# Altium PCB DecentralizeLV_LPDRV.PcbDoc
Units mil, origin at the board's own origin, x right, y up, seen from the top; angles counter-clockwise.
Board outline 5000 x 3675 mil, 2 copper layers (Top Layer, Bottom Layer); 63 components, 52 nets, 211 pads, 100 vias.
Unrouted connection lines stored in the file: 8.
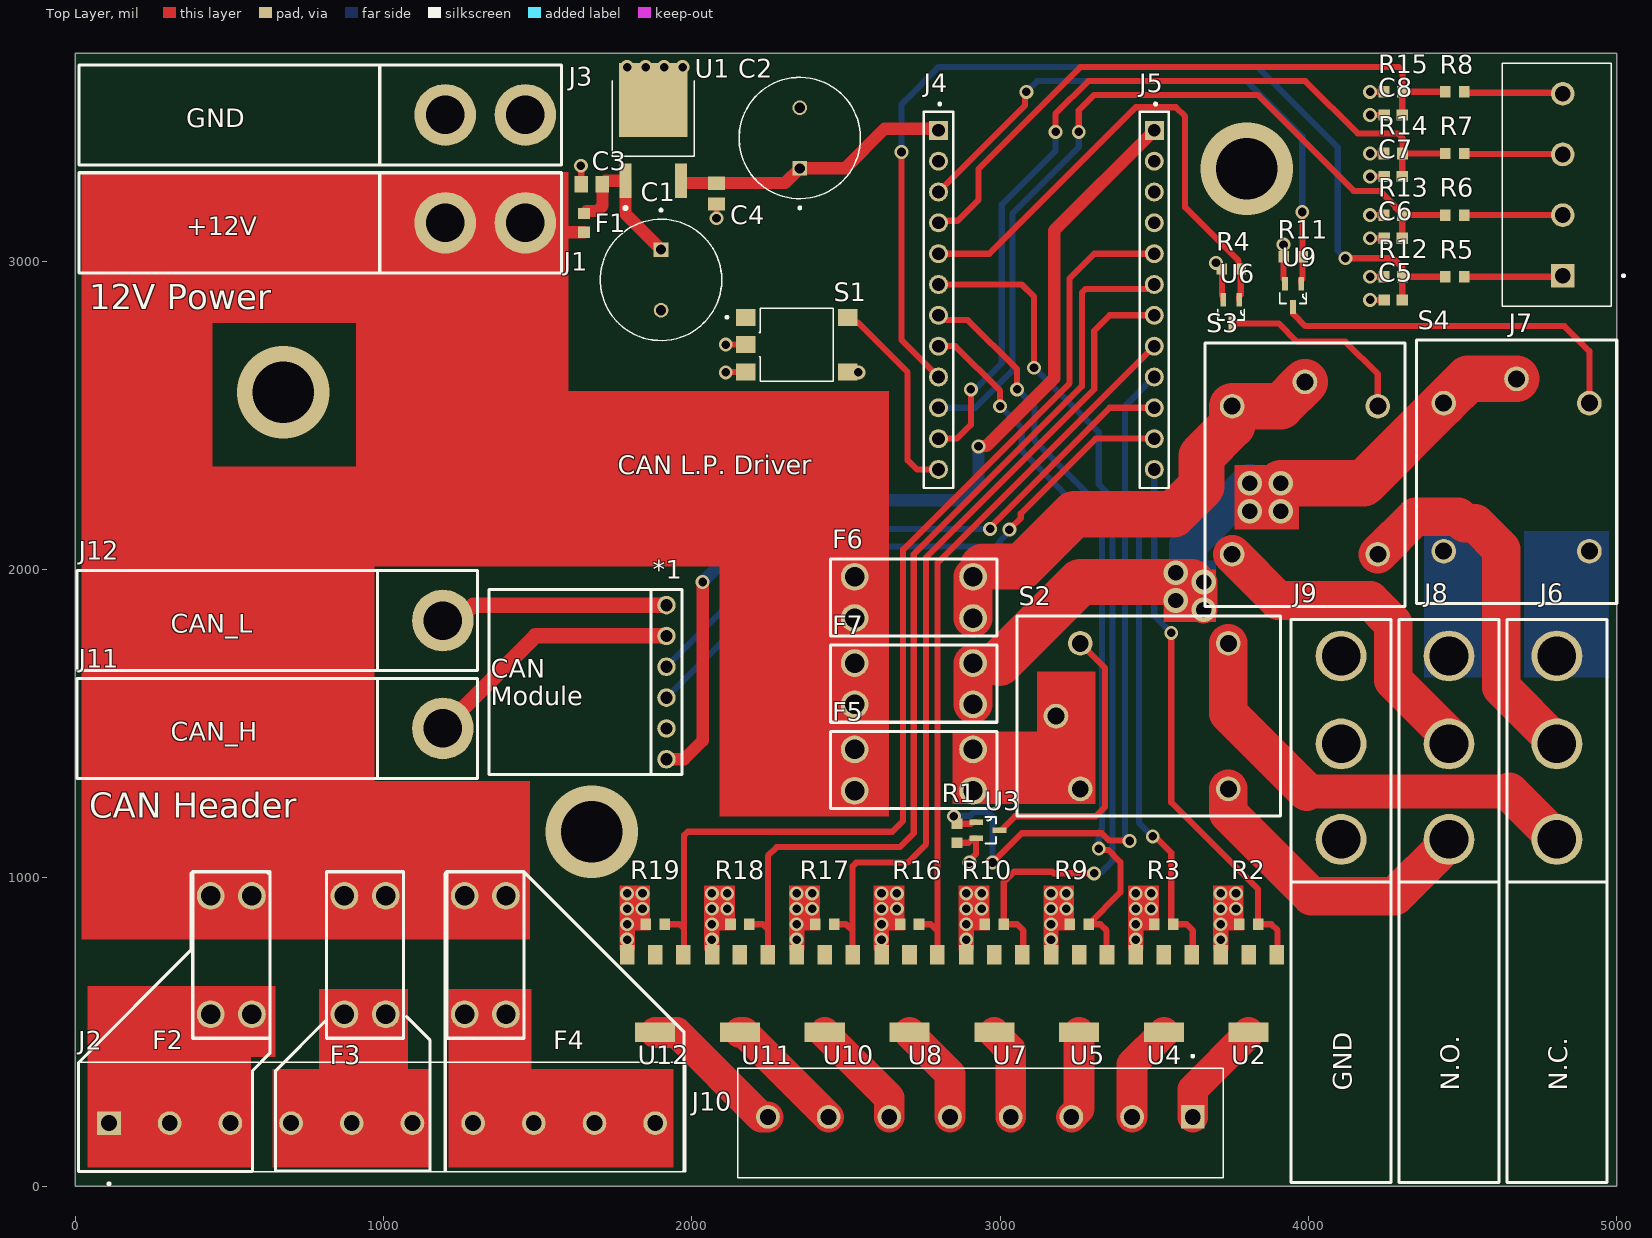
[diagram p0: Top Layer view]
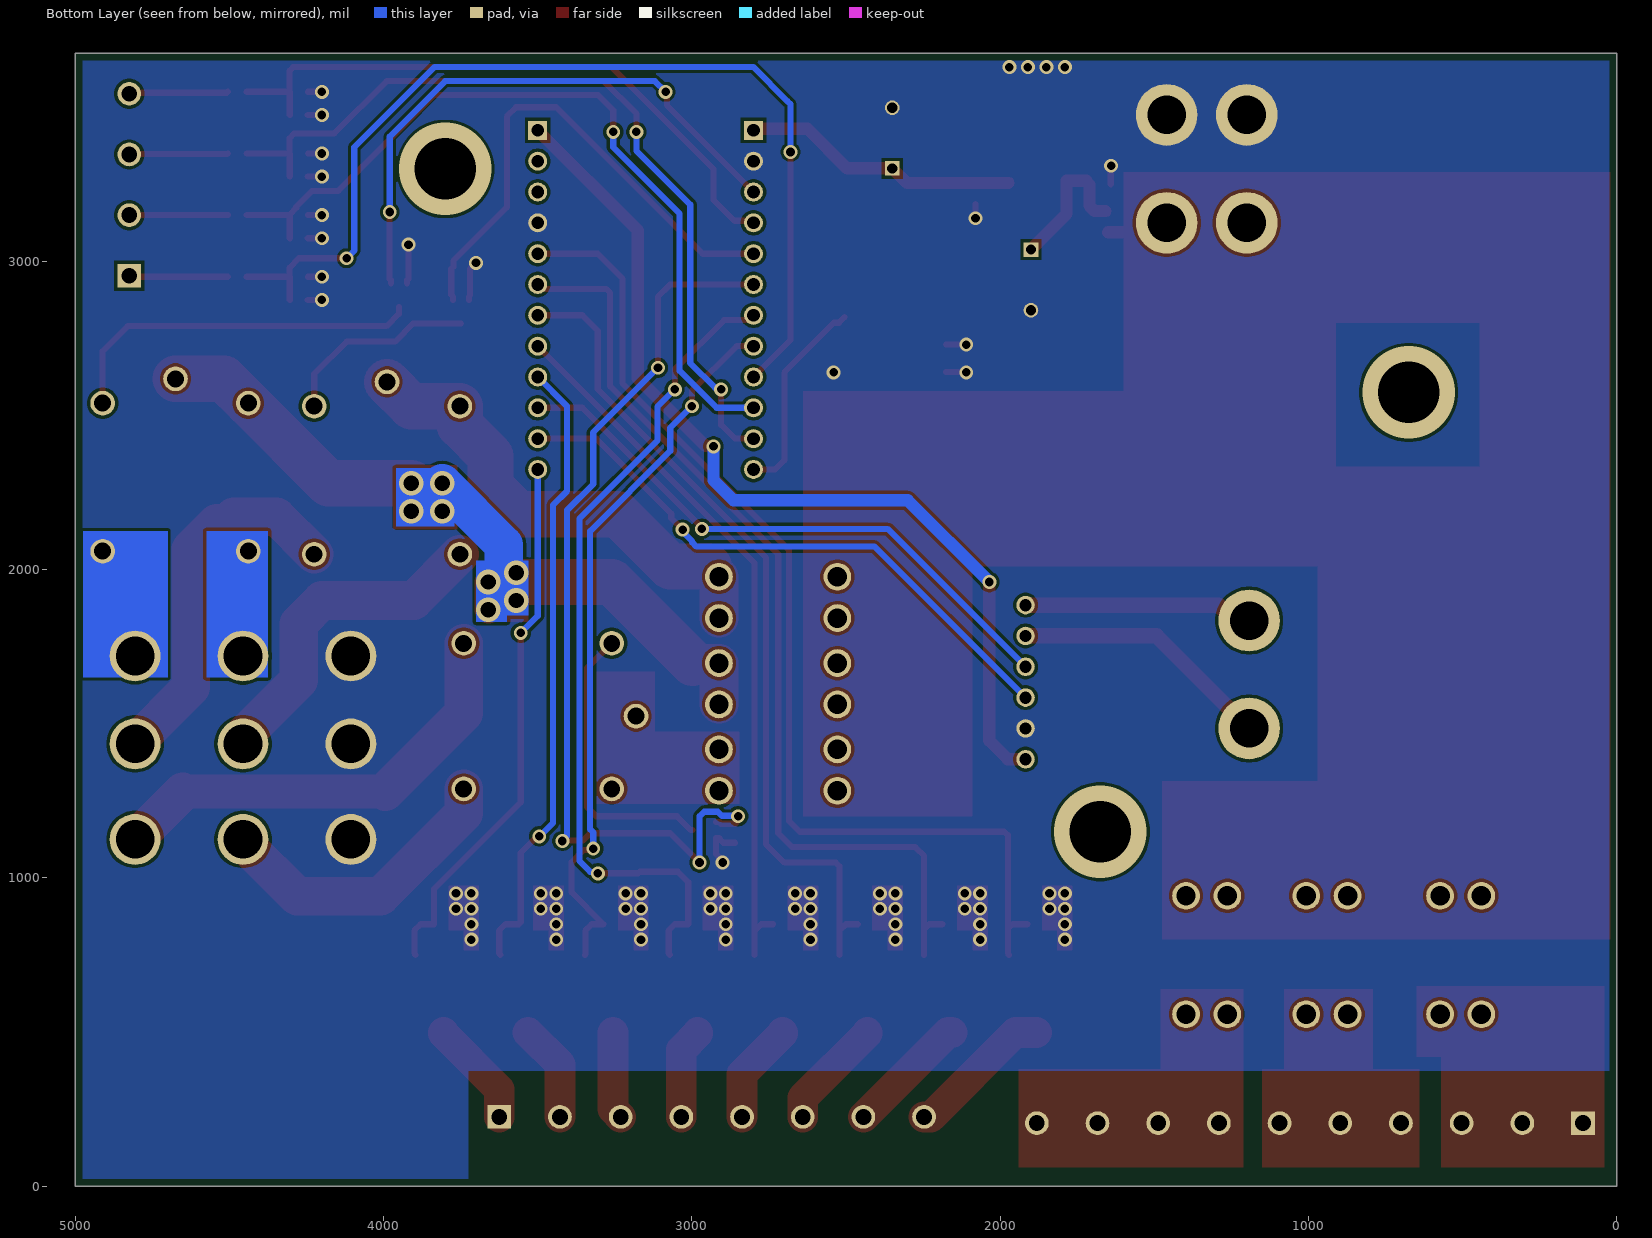
[diagram p1: Bottom Layer view, seen from below]

## Layer stack, top to bottom
Top Solder: solder mask 0.4, Solder Resist, Dk 3.5
Top Layer: signal copper 1.4
Dielectric 1: dielectric 12.6, FR-4, Dk 4.8
Bottom Layer: signal copper 1.4
Bottom Solder: solder mask 0.4, Solder Resist, Dk 3.5

## Board outline
0,0 5000,0 5000,3675 0,3675

## Design rules (kind name [scope] priority, off if disabled: settings)
Clearance [All] p1: gap=10 ignorepadtopadclearanceinfootprint=FALSE except(0: Arc-Hole Track-Hole SMDPad-Hole THPad-Hole Via-Hole Fill-Hole Poly-Hole Region-Hole Text-Hole)
PlaneClearance [All] p1: clearance=40
PlaneConnect [All] p1: planeconnectstyle=Direct reliefexpansion=20 reliefentries=4 reliefconductorwidth=10 reliefairgap=10
PolygonConnect [All] p1: connectstyle=Direct reliefconductorwidth=10 reliefentries=4 polygonreliefangle="90 Angle" airgapwidth=10
RoutingVias [All] p1: holewidth=28 width=50 viastyle="Through Hole" minholewidth=28 minwidth=50 maxholewidth=28 maxwidth=50
SolderMaskExpansion [All] p1: expansion=4 istentingtop=FALSE
Width [All] p1: maxlimit=1000 minlimit=10 preferedwidth=10
28 further rules are at their usual default settings.

## Components (designator, comment, footprint, x,y, rotation, side; value= is the part's Value field where it differs from the comment)
*1 "6POS_HDR" 6POS_HDR 1917.5,1635 r90 top
C1 "ECA1HM331B" CAPPRD500W60D1000H1600 1900,2940 r270 top
C2 "ECA1HM331B" CAPPRD500W60D1000H1600 2350,3400 r90 top
C3 "1uF 16V" CAPC2012X135N 1675,3250 r180 top
C4 "1uF 16V" CAPC2012X135N 2080,3220 r270 top
C5 "CL10B104KA8NNNC" CAPC1608X90N 4275,2875 r0 top
C6 "CL10B104KA8NNNC" CAPC1608X90N 4275,3075 r0 top
C7 "CL10B104KA8NNNC" CAPC1608X90N 4275,3275 r0 top
C8 "CL10B104KA8NNNC" CAPC1608X90N 4275,3475 r0 top
F1 "C2Q-2" FUSC1608X56N 1650,3125 r90 top
F2 "MiniAutomotiveFuseHolder" MiniBladeFuseHolder 506,750 r270 top
F3 "MiniAutomotiveFuseHolder" MiniBladeFuseHolder 940,750 r270 top
F4 "MiniAutomotiveFuseHolder" MiniBladeFuseHolder 1330,750 r270 top
F5 "MiniAutomotiveFuseHolder" MiniBladeFuseHolder 2720,1350 r0 top
F6 "MiniAutomotiveFuseHolder" MiniBladeFuseHolder 2720,1910 r0 top
F7 "MiniAutomotiveFuseHolder" MiniBladeFuseHolder 2720,1630 r0 top
J1 "DoubleAndersonEdgeMount" DoubleAndersonEdgeMount 700,3125 r0 top
J2 "TB001-500-10BE" CUI_TB001-500-10BE 109.35,204.72 r0 top
J3 "DoubleAndersonEdgeMount" DoubleAndersonEdgeMount 700,3475 r0 top
J4 "SSW-112-01-X-S" SAMTEC_SSW-112-01-X-S 2800,2875 r270 top
J5 "SSW-112-01-X-S" SAMTEC_SSW-112-01-X-S 3500,2875 r270 top
J6 "TripleAndersonEdgeMount" "TRIPLEANDERSONEDGEMOUNT - DUPLICATE" 4806,700 r90 top
J7 "TB001-500-04BE" CUI_TB001-500-04BE 4825,2953.15 r90 top
J8 "TripleAndersonEdgeMount" "TRIPLEANDERSONEDGEMOUNT - DUPLICATE" 4456,700 r90 top
J9 "TripleAndersonEdgeMount" "TRIPLEANDERSONEDGEMOUNT - DUPLICATE" 4106,700 r90 top
J10 "TB001-500-08BE" CUI_TB001-500-08BE 3624.7,225 r180 top
J11 "AndersonEdgeMount" AndersonEdgeMount 692.5,1485 r0 top
J12 "AndersonEdgeMount" AndersonEdgeMount 692.5,1835 r0 top
R1 "CRGCQ0603J10K" RESC1608X55N 2860,1145 r270 top
R2 "CRGCQ0603J10K" RESC1608X55N 3806,850 r180 top
R3 "CRGCQ0603J10K" RESC1608X55N 3531,850 r180 top
R4 "CRGCQ0603J10K" RESC1608X55N 3750,2975 r180 top
R5 "CRGCQ0603J10K" RESC1608X55N 4475,2950 r180 top
R6 "CRGCQ0603J10K" RESC1608X55N 4475,3150 r180 top
R7 "CRGCQ0603J10K" RESC1608X55N 4475,3350 r180 top
R8 "CRGCQ0603J10K" RESC1608X55N 4475,3550 r180 top
R9 "CRGCQ0603J10K" RESC1608X55N 3256,850 r180 top
R10 "CRGCQ0603J10K" RESC1608X55N 2981,850 r180 top
R11 "CRGCQ0603J10K" RESC1608X55N 3950,3015 r180 top
R12 "RMCF0603JT2K00" RESC1508X55N 4275,2950 r0 top
R13 "RMCF0603JT2K00" RESC1508X55N 4275,3150 r0 top
R14 "RMCF0603JT2K00" RESC1508X55N 4275,3350 r0 top
R15 "RMCF0603JT2K00" RESC1508X55N 4275,3550 r0 top
R16 "CRGCQ0603J10K" RESC1608X55N 2706,850 r180 top
R17 "CRGCQ0603J10K" RESC1608X55N 2431,850 r180 top
R18 "CRGCQ0603J10K" RESC1608X55N 2156,850 r180 top
R19 "CRGCQ0603J10K" RESC1608X55N 1881,850 r180 top
S1 "TS06-667-43-BK-260-G-SMT-TR" SW_TS06-667-43-BK-260-G-SMT-TR 2340,2730 r0 top
S2 "SPDT 12V Relay 16A" "G5LE-1-E DC12" 3500,1525 r0 top
S3 "SPDT 12V Relay 16A" "G5LE-1-E DC12" 3988.78,2290.16 r270 top
S4 "SPDT 12V Relay 16A" "G5LE-1-E DC12" 4675,2300 r270 top
U1 "NCV7805BDTRKG" DPAK229P990X238-4N 1875,3425 r0 top
U2 "MOSFET N-CH" ZXMN6A09GTA 3806,625 r180 top
U3 "2N7002W-7-F" SOT65P210X110-3N 2960,1155 r0 top
U4 "MOSFET N-CH" ZXMN6A09GTA 3531,625 r180 top
U5 "MOSFET N-CH" ZXMN6A09GTA 3256,625 r180 top
U6 "2N7002W-7-F" SOT65P210X110-3N 3749,2837 r270 top
U7 "MOSFET N-CH" ZXMN6A09GTA 2981,625 r180 top
U8 "MOSFET N-CH" ZXMN6A09GTA 2706,625 r180 top
U9 "2N7002W-7-F" SOT65P210X110-3N 3950,2890 r270 top
U10 "MOSFET N-CH" ZXMN6A09GTA 2431,625 r180 top
U11 "MOSFET N-CH" ZXMN6A09GTA 2156,625 r180 top
U12 "MOSFET N-CH" ZXMN6A09GTA 1881,625 r180 top

## Footprints (in the part's own frame and the unit in brackets; to place one, negate y for a bottom-side part, rotate by r counter-clockwise, add the part's x,y. Pads: shape width x height; smd on the part's side, far side on the other; paste and mask are expansions set on the pad)
6POS_HDR [mil] "6 Position 0.1 Pitch Header"
  round 60 hole 40: 1(-250,0) 2(-150,0) 3(-50,0) 4(50,0) 5(150,0) 6(250,0)
  silkscreen extent -300,-50 300,50
AndersonEdgeMount [mil] "An edge mounted anderson connector!"
  round 200 hole 125: 1(500,0)
  silkscreen extent -688,-162 612,162
CAPC1608X90N [mm]
  rect 0.95x0.93 smd: 1(-0.738,0) 2(0.738,0)
CAPC2012X135N [mm]
  rect 1.1x1.38 smd: 1(-0.863,0) 2(0.863,0)
  body extent -1,-0.63 1,0.63, height 1.35
CAPPRD500W60D1000H1600 [mm]
  round 1.2 hole 0.85: N(2.5,0)
  rect 1.2x1.2 hole 0.85: P(-2.5,0)
  silkscreen extent -5.85,-5 5,5, body extent -5,-5 5,5, height 16
CUI_TB001-500-04BE [mm]
  rect 1.95x1.95 hole 1.3: 1(0,0)
  round 1.95 hole 1.3: 2(5,0) 3(10,0) 4(15,0)
  silkscreen extent -2.5,-5.1 17.5,5
CUI_TB001-500-08BE [mm]
  rect 1.95x1.95 hole 1.3: 1(0,0)
  round 1.95 hole 1.3: 2(5,0) 3(10,0) 4(15,0) 5(20,0) 6(25,0) 7(30,0) 8(35,0)
  silkscreen extent -2.5,-5.1 37.5,5
CUI_TB001-500-10BE [mm]
  rect 1.95x1.95 hole 1.3: 1(0,0)
  round 1.95 hole 1.3: 2(5,0) 3(10,0) 4(15,0) 5(20,0) 6(25,0) 7(30,0) 8(35,0) 9(40,0) 10(45,0)
  silkscreen extent -2.5,-5.1 47.5,5
DoubleAndersonEdgeMount [mil] "An edge mounted anderson connector!"
  round 200 hole 125: 1(500,0) 2(760,0)
  silkscreen extent -688,-162 878,162
DPAK229P990X238-4N [mm]
  rect 0.97x2.83 smd: 1(-2.29,-4.14) 3(2.29,-4.14)
  rect 5.63x6.09 smd paste-2.39: 2(0,2.51)
  silkscreen extent -3.37,-6.5 3.37,4.09, body extent -4.95,-3.25 4.95,3.25, height 2.39
FUSC1608X56N [mm]
  rect 0.93x0.99 smd: 1(-0.77,0) 2(0.77,0)
  body extent -0.8,-0.41 0.8,0.41, height 0.56
"G5LE-1-E DC12" [mil] "GeneralPurposeRelay16A"
  round 80 hole 55: 1(-318.9,0) 2(-240.16,-236.22) 3(240.16,-236.22) 4(240.16,236.22) 5(-240.16,236.22)
  silkscreen extent -445,-325 410,325
MiniBladeFuseHolder [mil]
  round 90 hole 63: 1(-192,-67) 1(-192,67) 2(192,-67) 2(192,67)
  silkscreen extent -270,-125 270,125
RESC1508X55N [mm]
  rect 0.9x0.97 smd: 1(-0.76,0) 2(0.76,0)
  body extent -0.77,-0.4 0.77,0.4, height 0.55
RESC1608X55N [mm]
  rect 0.87x0.93 smd: 1(-0.78,0) 2(0.78,0)
  body extent -0.8,-0.4 0.8,0.4, height 0.55
SAMTEC_SSW-112-01-X-S [mm]
  rect 1.56x1.56 hole 1.04: 01(-13.97,0)
  round 1.56 hole 1.04: 02(-11.43,0) 03(-8.89,0) 04(-6.35,0) 05(-3.81,0) 06(-1.27,0) 07(1.27,0) 08(3.81,0) 09(6.35,0) 10(8.89,0) 11(11.43,0) 12(13.97,0)
  silkscreen extent -16.24,-1.2 15.5,1.2
SOT65P210X110-3N [mil]
  rect 44x18 smd: 1(-38,26) 2(-38,-26) 3(38,0)
  silkscreen extent -7,-43 27,43
SW_TS06-667-43-BK-260-G-SMT-TR [mm]
  rect 1.6x1.4 smd: 1(-4.2,2.25) 2(-4.2,-2.25) 3(4.2,2.25) 4(4.2,-2.25) 5(-4.2,0)
  silkscreen extent -5.85,-3 3,3
"TRIPLEANDERSONEDGEMOUNT - DUPLICATE" [mil] "An edge mounted anderson connector!"
  round 165 hole 125: 1(425,0) 2(735,0) 3(1020,0)
  silkscreen extent -688,-163 1138,163
ZXMN6A09GTA [mm] "N-Channel MOSFET 60V 5.4A"
  rect 1.2x1.6 smd: 1(-2.3,-3.2) 2(0,-3.2) 3(2.3,-3.2)
  rect 3.3x1.6 smd: 2(0,3.2)

## Part data
C1 C2: "M-A", Package=None, Availability=Unavailable, MF="{'manufacturer': u'Panasonic Electronic'}", MP=ECA1HM331B, Price=None
C3 C4: library part CL21B105KOFNNNE, "Cap Ceramic 1uF 16V X7R 10% Pad SMD 0805 125C T/R", Package=None, Availability=Unavailable, MF="{'manufacturer': u'Samsung Electro-Mechanics'}", MP=CL21B105KOFNNNE, Price=None
C5 C6 C7 C8 F1 J2 J7 J10 R12 R13 R14 R15 S1 U1: Package=None, Availability=Unavailable, Price=None
  C5 C6 C7 C8: MF="{'manufacturer': u'Samsung Electro-Mechanics'}", MP=CL10B104KA8NNNC
  F1: MF="{'manufacturer': u'Bel Fuse'}", MP=C2Q-2
  J2: MF="{'manufacturer': u'CUI Devices'}", MP=TB001-500-10BE
  J7: MF="{'manufacturer': u'CUI Devices'}", MP=TB001-500-04BE
  J10: MF="{'manufacturer': u'CUI Devices'}", MP=TB001-500-08BE
  R12 R13 R14 R15: MF="{'manufacturer': u'Stackpole Electronics Inc'}", MP=RMCF0603JT2K00
  S1: MF="{'manufacturer': u'CUI Devices'}", MP=TS06-667-43-BK-260-G-SMT-TR
  U1: MF="{'manufacturer': u'ON Semiconductor'}", MP=NCV7805BDTRKG
F2 F3 F4 F5 F6 F7: library part MiniBladeFuseHolder, "Blade Fuse Holder Automotive Mini"
J1 J3 J6 J8 J9 J11 J12: "Edge Mounted Anderson Connector"
J4 J5: "CONN RCPT 12POS 0.1 GOLD PCB", Package=None, Availability=Unavailable, MF="{'manufacturer': u'Samtec'}", MP=SSW-112-01-X-S, Price=None
R1 R2 R3 R4 R5 R6 R7 R8 R9 R10 R11 R16 R17 R18 R19: "Fixed Resistor CRGCQ 0603 10K 5%", Package=None, Availability=Unavailable, MF="{'manufacturer': u'TE Connectivity'}", MP=CRGCQ0603J10K, Price=None
S2 S3 S4: library part "G5LE-1-E DC12"
U2 U4 U5 U7 U8 U10 U11 U12: library part ZXMN6A09GTA
U3 U6 U9: "N-CHANNEL ENHANCEMENT MODE FIELD EFFECT TRANSISTOR", Package=None, Availability=Unavailable, MF="{'manufacturer': u'Diodes Zetex'}", MP=2N7002W-7-F, Price=None

## Via types
v1: diameter 45, hole 28, Top Layer to Bottom Layer, 89 vias
v2: diameter 80, hole 50, Top Layer to Bottom Layer, 8 vias
v3: diameter 300, hole 200, Top Layer to Bottom Layer, 3 vias

## Nets (pads, with @x,y where several pads share a name; then routed paths per layer and width w, separated by ;. In a path a pad name is that pad's centre, name@x,y a point inside that pad or via, vN(x,y) a via of type N, cw(c..) or ccw(c..) an arc to the next point about the centre after c; other vN are vias at no path point)
3V3: *1.1 J5.01 | length 3074.8
  Top Layer w40: *1.1 1975,1385 2035,1445 v1(2035,1960) ; v1(2930,2400) 2930.96,2400.96 2955.96,2400.96 3175,2620 3175,3100 J5.01
  Bottom Layer w40: v1(2035,1960) 2300,2225 2865,2225 2930,2290 v1(2930,2400)
5V0: C2.P C4.1 J4.01 U1.3 | length 913.2
  Top Layer w20: U1.3 U1.3@1973.19,3253.98 ; J4.01@2795,3430 J4.01
  Top Layer w40: U1.3@1973.19,3253.98 C4.1 2302.4,3253.98 C2.P 2496.57,3301.57 2625,3430 J4.01@2795,3430
12V0: C1.P C3.1 F1.2 U1.1 | length 493
  Top Layer w20: F1.2 F1.2@1658.31,3163.62 ; C3.1@1710,3248.98 C3.1 1708.98,3250.35 C3.1@1720.63,3262.01
  Top Layer w40: F1.2@1658.31,3163.62 1693.62,3163.62 1710,3180 C3.1@1710,3248.98 ; C3.1@1720.63,3262.01 U1.1 1784.84,3153.58 C1.P
12V0_UF: F1.1 F2.1 F3.1 F4.1 F5.1 F6.1 F7.1 J1.1 J1.2 | length 202.6
  Top Layer w20: J1.2 J1.2@1490.32,3094.68
  Top Layer w40: J1.2@1490.32,3094.68 F1.1
CAN_H: *1.5 J11.1 | length 849.3
  Top Layer w50: J11.1 1492.5,1785 *1.5
CAN_L: *1.6 J12.1 | length 745.7
  Top Layer w20: J12.1 J12.1@1241.21,1835
  Top Layer w50: J12.1@1241.21,1835 1291.21,1885 *1.6
CAN_RX: *1.4 J5.10 | length 1933.4
  Top Layer w20: v1(2967.55,2132.45) 2967.55,2137.55 3355,2525 J5.10
  Bottom Layer w20: *1.4 2364.95,2132.45 v1(2967.55,2132.45)
CAN_TX: *1.3 J5.11 | length 1945.1
  Top Layer w20: v1(3030,2130) 3030,2130.86 3066.69,2167.55 3066.69,2181.69 3310,2425 J5.11
  Bottom Layer w20: *1.3 2407.5,2075 2985,2075 2999.14,2089.14 2999.14,2092.38 3030,2123.24 v1(3030,2130)
GND: *1.2 C1.N C2.N C3.2 C4.2 C5.1 C6.1 C7.1 C8.1 J3.1 J3.2 J4.02 J5.04 J9.1 J9.2 J9.3 R1.2 R2.2 R3.2 R4.2 R9.2 R10.2 R11.2 R12.1 R13.1 R14.1 R15.1 R16.2 R17.2 R18.2 R19.2 S1.2 S1.4 S1.5 U1.2 U2.3 U3.2 U4.3 U5.3 U6.2 U7.3 U8.3 U9.2 U10.3 U11.3 U12.3 | length 1021.7
  Top Layer w20: v1@1640,3300 1641.02,3298.98 C3.2 ; v1(2080,3140) C4.2 ; v1(2110,2640) 2111.42,2641.42 S1.2 ; v1(2110,2730) S1.5 ; R1.2 2898.28,1114.29 2910,1126.01 2910,1128 2911,1129 U3.2@2919.5,1129 ; v1(2900,1050) 2900,1056.76 2922,1078.76 2922,1128 2921,1129 2912.99,1129 U3.2 ; v1(3700.3,2995.3) 3700.3,2995.17 3719.29,2976.18 3719.29,2889.71 3723,2886 U6.2 ; v1@3920,3055 v1(3919.29,3054.29) R11.2 3919.29,2943.71 3924,2939 U9.2 ; v1(4200,2875) C5.1 ; v1(4200,2950) R12.1 ; v1(4200,3075) C6.1 ; v1(4200,3150) R13.1 ; v1(4200,3275) C7.1 ; v1(4200,3350) R14.1 ; v1(4200,3475) C8.1 ; v1(4200,3550) R15.1
  other v1: 1790,800 2065,800 2340,800 2615,800 2890,800 3165,800 3440,800 3715,800 1790,850 2065,850 2340,850 2615,850 2890,850 3165,850 3440,850 3715,850 1790,900 1840,900 2065,900 2115,900 2340,900 2390,900 2615,900 2665,900 2890,900 2940,900 3165,900 3215,900 3440,900 3490,900 3715,900 3765,900 1790,950 1840,950 2065,950 2115,950 2340,950 2390,950 2615,950 2665,950 2890,950 2940,950 3165,950 3215,950 3440,950 3490,950 3715,950 3765,950 2540,2640 1640,3310 1790,3630 1850,3630 1910,3630 1970,3630
NetC5_2: C5.2 J4.09 R5.2 R12.2 | length 3319.6
  Top Layer w20: v1(2680,3355) 2680,2745 J4.09 ; v1(4120,3010) 4275,3010 4305,2980 4305,2950.08 R12.2 ; C5.2 4304.49,2875.43 4304.49,2949.57 R12.2 ; R5.2 R12.2
  Bottom Layer w20: v1(2680,3355) 2680,3510 2690,3520 2800,3630 3835,3630 4095,3370 4095,3035 v1(4120,3010)
NetC6_2: C6.2 J4.10 R6.2 R13.2 | length 2673.7
  Top Layer w20: v1(3255,3420) 3255,3490 3305,3540 3835,3540 4146.44,3228.56 4231.62,3228.56 4283.06,3177.11 4283.06,3173.24 4304.92,3151.38 R13.2 ; C6.2 4304.49,3075.43 4304.49,3149.57 R13.2 ; R6.2 R13.2
  Bottom Layer w20: J4.10 2920,2525 3040,2645 3040,3155 3255,3370 v1(3255,3420)
NetC7_2: C7.2 J4.11 R7.2 R14.2 | length 2766.2
  Top Layer w20: J4.11 2860,2425 2905,2470 v1(2905,2585) ; v1(3180,3420) 3180,3480 3285,3585 3990,3585 4160,3415 4290,3415 4304.92,3400.08 R14.2 ; C7.2 4304.49,3275.43 4304.49,3349.57 R14.2 ; R7.2 R14.2
  Bottom Layer w20: v1(2905,2585) 2909.78,2589.78 2924.78,2589.78 3005,2670 3005,3184.12 3180,3359.12 v1(3180,3420)
NetC8_2: C8.2 J4.04 R8.2 R15.2 | length 2060.5
  Top Layer w20: J4.04 2806.86,3131.86 2861.86,3131.86 2930,3200 2930,3300 3260,3630 4293.21,3630 4304.92,3618.28 R15.2 ; C8.2 4304.49,3475.43 4304.49,3549.57 R15.2 ; R8.2 R15.2
NetF2_2: F2.2 J2.1 J2.2 J2.3
NetF3_2: F3.2 J2.4 J2.5 J2.6
NetF4_2: F4.2 J2.7 J2.8 J2.9 J2.10
NetF5_2: F5.2 S2.1 S2.2 | length 268.8
  Top Layer w20: S2.1 3181.1,1367.52 S2.2
NetF6_2: F6.2 S3.1 S3.2 | length 1566.6
  Top Layer w125: F6.2@2912,1843 2912,1977 2945,2010
  Top Layer w150: 2945,2010 3070,2010 3240,2180 3562.71,2180 3653.01,2270.3 3653.01,2369.02 3752.56,2468.56 S3.2 3910.04,2530.32 S3.1
NetF7_2: F7.2 S4.1 S4.2 | length 2340.1
  Top Layer w90: v2(3660,1870) v2(3660,1960)
  Top Layer w125: F7.2@2912,1563 2912,1697 2997,1697
  Top Layer w150: 2997,1697 3260,1960 v2@3620.94,1960 ; v2(3910,2280) 4178.62,2280 S4.2 4517.52,2618.9 S4.1
  Bottom Layer w125: 3610,1970 3610,2080 v2(3810,2280)
  other v2: 3570,1900 3570,1990 3810,2190 3910,2190
NetJ4_03: J4.03 R11.1 U9.1 | length 1906.4
  Top Layer w20: J4.03 3080.22,3505.22 3080.22,3545.22 v1(3085,3550) ; U9.1 3976,2939 3980.71,2943.71 R11.1 3980.35,3015.35 3980.35,3159.65 v1(3980,3160)
  Bottom Layer w20: v1(3085,3550) 3120,3585 3800,3585 3980,3405 v1(3980,3160)
NetJ4_05: J4.05 R4.1 U6.1 | length 1682.6
  Top Layer w20: J4.05 2965,3025 3440,3500 3570,3500 3600,3470 3600,3175 3773.58,3001.42 3773.58,2982.13 R4.1 ; U6.1 3775,2886 3780.71,2891.71 R4.1@3780.71,2976.18
NetJ4_06: J4.06 R1.1 U3.1 | length 3094.7
  Top Layer w20: J4.06 3070,2925 3110,2885 v1(3110,2655) ; v1(2850,1200) 2854.78,1195.22 2854.78,1180.93 R1.1 2905.71,1175.71 2911,1181 U3.1 ; v1(2975,1050) 3070,1145 3330.1,1145 3353.92,1121.18 3418.82,1121.18 v1(3420,1120)
  Bottom Layer w20: v1(2850,1200) 2851.62,1201.62 2902.5,1201.62 2915.88,1215 2960,1215 2975,1200 v1(2975,1050) ; v1(3110,2655) 3320,2445 3320,2277.5 3405,2192.5 3405,1135 v1(3420,1120)
NetJ4_07: J4.07 R10.1 U7.1 | length 2725.3
  Top Layer w20: J4.07 2811.21,2825 2826.64,2809.57 2895.43,2809.57 3055,2650 v1(3055,2585) ; U7.1 3075,754.43 3075,830 3055,850 R10.1 3011.71,986.71 3045,1020 3169.12,1020 3174.12,1015 v1(3305,1015)
  Bottom Layer w20: v1(3055,2585) 3111.46,2528.54 3111.46,2418.54 3365,2165 3365,1055 3329.78,1019.78 3309.78,1019.78 v1(3305,1015)
NetJ4_08: J4.08 R9.1 U5.1 | length 2364.5
  Top Layer w20: J4.08 2855,2725 3000,2580 v1(3000,2530) ; v1(3320,1095) 3323.82,1091.18 3350.43,1091.18 3390,1051.61 3390,953.29 R9.1 3325,850 3345,830 3345,752.54 U5.1
  Bottom Layer w20: v1(3000,2530) 3070,2460 3070,2385 3330,2125 3330,1157.5 3320,1147.5 v1(3320,1095)
NetJ4_12: J4.12 S1.3 | length 666
  Top Layer w20: S1.3 2522.91,2801.02 2538.98,2801.02 2700,2640 2700,2355 2730,2325 J4.12
NetJ5_05: J5.05 R19.1 U12.1 | length 3479.4
  Top Layer w20: R19.1 1960,850 1975,835 ; U12.1 1975,754.43 1975,835 ; J5.05 3305,3025 3225,2945 3225,2605 2685,2065 2685,1185 2650,1150 1986.72,1150 1975,1138.28 1975,835
NetJ5_06: J5.06 R18.1 U11.1 | length 3116.2
  Top Layer w20: R18.1 2230,850 2246.55,833.45 ; U11.1 2246.55,833.45 ; J5.06 3488.79,2925 3473.79,2910 3276.72,2910 3265,2898.28 3265,2595 2720,2050 2720,1145 2675,1100 2275,1100 2246.55,1071.55 2246.55,833.45
NetJ5_07: J5.07 R17.1 U10.1 | length 2730.7
  Top Layer w20: R17.1 2500,850 2521.55,828.45 ; U10.1 2521.55,828.45 ; J5.07 3355,2825 3305,2775 3305,2585 2760,2040 2760,1110 2700,1050 2533.27,1050 2521.55,1038.28 2521.55,828.45
NetJ5_08: J5.08 R16.1 U8.1 | length 2334.2
  Top Layer w20: R16.1 2775,850 2796.55,828.45 ; U8.1 2796.55,828.45 ; J5.08 2796.55,2021.55 2796.55,828.45
NetJ5_09: J5.09 R3.1 U4.1 | length 2036.2
  Top Layer w20: v1(3495,1135) 3501.76,1135 3555,1081.76 3555,856.71 R3.1 3605,850 3625,830 3625,754.43 U4.1
  Bottom Layer w20: v1(3495,1135) 3493.39,1135 3450,1178.39 3450,2210 3405,2255 3405,2530 J5.09
NetJ5_12: J5.12 R2.1 U2.1 | length 1766.5
  Top Layer w20: v1(3555,1795) 3555,1245 3836.71,963.29 R2.1 3880,850 3900,830 3900,754.43 U2.1
  Bottom Layer w20: J5.12 3500,1850 v1(3555,1795)
NetJ6_1: J6.1 S2.4 | length 1462
  Top Layer w110: 3995,1280 4651,1280
  Top Layer w125: S2.4 3740.16,1534.84 3995,1280 ; 4651,1280 J6.1
NetJ6_2: J6.2 S3.4 | length 1200.6
  Top Layer w125: S3.4 4347.34,2172.34 4485.38,2172.34 4507.72,2150 4541.78,2150 4625,2066.78 4625,1618 J6.2@4807,1436
NetJ6_3: J6.3 S4.4
NetJ7_1: J7.1 R5.1 | length 320.6
  Top Layer w20: R5.1 4821.85,2950 J7.1
NetJ7_2: J7.2 R6.1 | length 319.3
  Top Layer w20: R6.1 J7.2
NetJ7_3: J7.3 R7.1 | length 320.6
  Top Layer w20: R7.1 4507.28,3348.43 4823.43,3348.43 J7.3
NetJ7_4: J7.4 R8.1 | length 321.9
  Top Layer w20: R8.1 4508.86,3546.85 4821.85,3546.85 J7.4
NetJ8_1: J8.1 S2.3 | length 985.3
  Top Layer w125: S2.3 3740.16,1209.84 4010,940 4280,940 4448.41,1108.41 J8.1@4448.41,1125
NetJ8_2: J8.2 S3.3 | length 1088.1
  Top Layer w100: J8.2@4450,1425 J8.2@4450,1466
  Top Layer w125: S3.3 3902.56,1900 4200,1900 4275,1825 4275,1641 J8.2@4450,1466
NetJ8_3: J8.3 S4.3
NetJ10_1: J10.1 U2.2 | length 349.1
  Top Layer w100: J10.1 3624.7,314.17 3806,495.47 U2.2@3806,499.02
NetJ10_2: J10.2 U4.2 | length 316.7
  Top Layer w100: J10.2 3427.85,395.87 U4.2@3531,499.02
NetJ10_3: J10.3 U5.2 | length 284.4
  Top Layer w100: J10.3 3256,250 U5.2@3256,499.02
NetJ10_4: J10.4 U7.2 | length 296
  Top Layer w100: U7.2@2981,499.02 2981,495.47 3034.15,442.32 J10.4
NetJ10_5: J10.5 U8.2 | length 328.4
  Top Layer w100: U8.2@2706,499.02 2706,495.47 2837.3,364.17 J10.5
NetJ10_6: J10.6 U10.2 | length 360.8
  Top Layer w100: U10.2@2431,499.02 2431,495.47 2640.45,286.02 J10.6
NetJ10_7: J10.7 U11.2 | length 401.1
  Top Layer w100: U11.2@2156,499.02 2169.58,499.02 J10.7
NetJ10_8: J10.8 U12.2 | length 479.2
  Top Layer w100: U12.2@1881,499.02 1950.98,499.02 2225,225 J10.8
NetS2_5: S2.5 U3.3 | length 937.5
  Top Layer w20: U3.3 3003.5,1155 3048.5,1200 3310,1200 3340,1230 3340,1681.06 S2.5
NetS3_5: S3.5 U6.3 | length 648.6
  Top Layer w20: U6.3 3903.72,2799 3962.72,2740 4120,2740 4225,2635 S3.5
NetS4_5: S4.5 U9.3 | length 1202.1
  Top Layer w20: U9.3 3950,2830 3990,2790 4830,2790 4911.22,2708.78 S4.5
pads on no net: J5.02 J5.03 S1.1
copper on no net:
  other v3: 1675,1150 675,2575 3800,3300

## Polygon pours and split planes (outlines as drawn)
GND on Bottom Layer "NONET_L-01_P-001" (solid, pour order 0): 4975,3650 4975,2175 4975,1850 4975,25 3725,25 3725,375 1475,375 25,375 25,3650

## Other copper
Top Layer:
  rectangle net NetF7_2: 3530,1830 3700,2000
  rectangle net NetF7_2: 3760,2130 3970,2340
  rectangle net 12V0_UF: 2090,1200 2640,2460
  rectangle net 12V0_UF: 910,2010 2640,2580
  rectangle net 12V0_UF: 910,2420 1600,3285
  rectangle net 12V0_UF: 20,2175 445,3280
  rectangle net GND: 3690,765 3740,920
  rectangle net GND: 3690,830 3790,975
  rectangle net GND: 3415,765 3465,920
  rectangle net GND: 3415,830 3515,975
  rectangle net GND: 3140,765 3190,920
  rectangle net GND: 3140,830 3240,975
  rectangle net GND: 2865,765 2915,920
  rectangle net GND: 2865,830 2965,975
  rectangle net GND: 2590,765 2640,920
  rectangle net GND: 2590,830 2690,975
  rectangle net GND: 1765,765 1815,920
  rectangle net GND: 1765,830 1865,975
  rectangle net GND: 2315,765 2365,920
  rectangle net GND: 2315,830 2415,975
  rectangle net GND: 2040,830 2140,975
  rectangle net GND: 2040,765 2090,920
  rectangle net NetF5_2: 3120,1240 3310,1670
  rectangle net NetF5_2: 2845,1240 3175,1475
  rectangle net NetF2_2: 40,60 570,650
  rectangle net NetF2_2: 340,420 650,650
  rectangle net NetF3_2: 640,60 1150,380
  rectangle net NetF3_2: 790,290 1080,640
  rectangle net NetF4_2: 1210,60 1480,640
  rectangle net NetF4_2: 1210,60 1940,380
  rectangle net 12V0_UF: 450,800 1475,1315
  rectangle net 12V0_UF: 20,800 970,2335
  rectangle net 12V0_UF: 20,2800 1600,3290
Bottom Layer:
  rectangle net NetF7_2: 3770,2140 3960,2330
  rectangle net NetF7_2: 3600,1830 3700,1860
  rectangle net NetF7_2: 3530,1850.7 3700,2030
  rectangle net NetJ6_3: 4700,1650 4975,2125
  rectangle net NetJ8_3: 4375,1650 4575,2125

## Silkscreen, mask and mechanical layers (free items; w line width, h text height)
Top Overlay:
  lines w10: 625,1014 631,1020 381,1020 375,1014 375,765.65 10.92,401.57 10.92,47.24 572.24,47.24 575,50 575,375 631,431 631,480 ; 815,1020 815,540 650,375 650,50 1150,50 1150,475 1075,550 ; 1200,50 1200,1015 1205,1020 1455,1020 1975,500 1975,51.67 1973.33,50 ; 1342.5,1335 1967.5,1335 1967.5,1935 1342.5,1935 1342.5,1335
  text "GND" at 360,3435 h60
  text "+12V" at 360,3085 h60
  text "12V Power" at 45,2845 h80
  text "CAN L.P. Driver" at 1760,2310 h60
  text "CAN_L" at 310,1795 h60
  text "CAN / Module" at 1347.59,1560 h60
  text "CAN_H" at 310,1445 h60
  text "CAN Header" at 45,1195 h80
  text "GND" at 4140,310 h60 r90
  text "N.O." at 4490,310 h60 r90
  text "N.C." at 4840,310 h60 r90
Mechanical 1:
  the board outline again, w10